# Altium PCB BRCM-V2.1-Master.PcbDoc
Units mm, origin at the board's own origin, x right, y up, seen from the top; angles counter-clockwise.
Board outline 110 x 50 mm, 2 copper layers (Top Layer, Bottom Layer); 95 components, 69 nets, 366 pads, 153 vias.
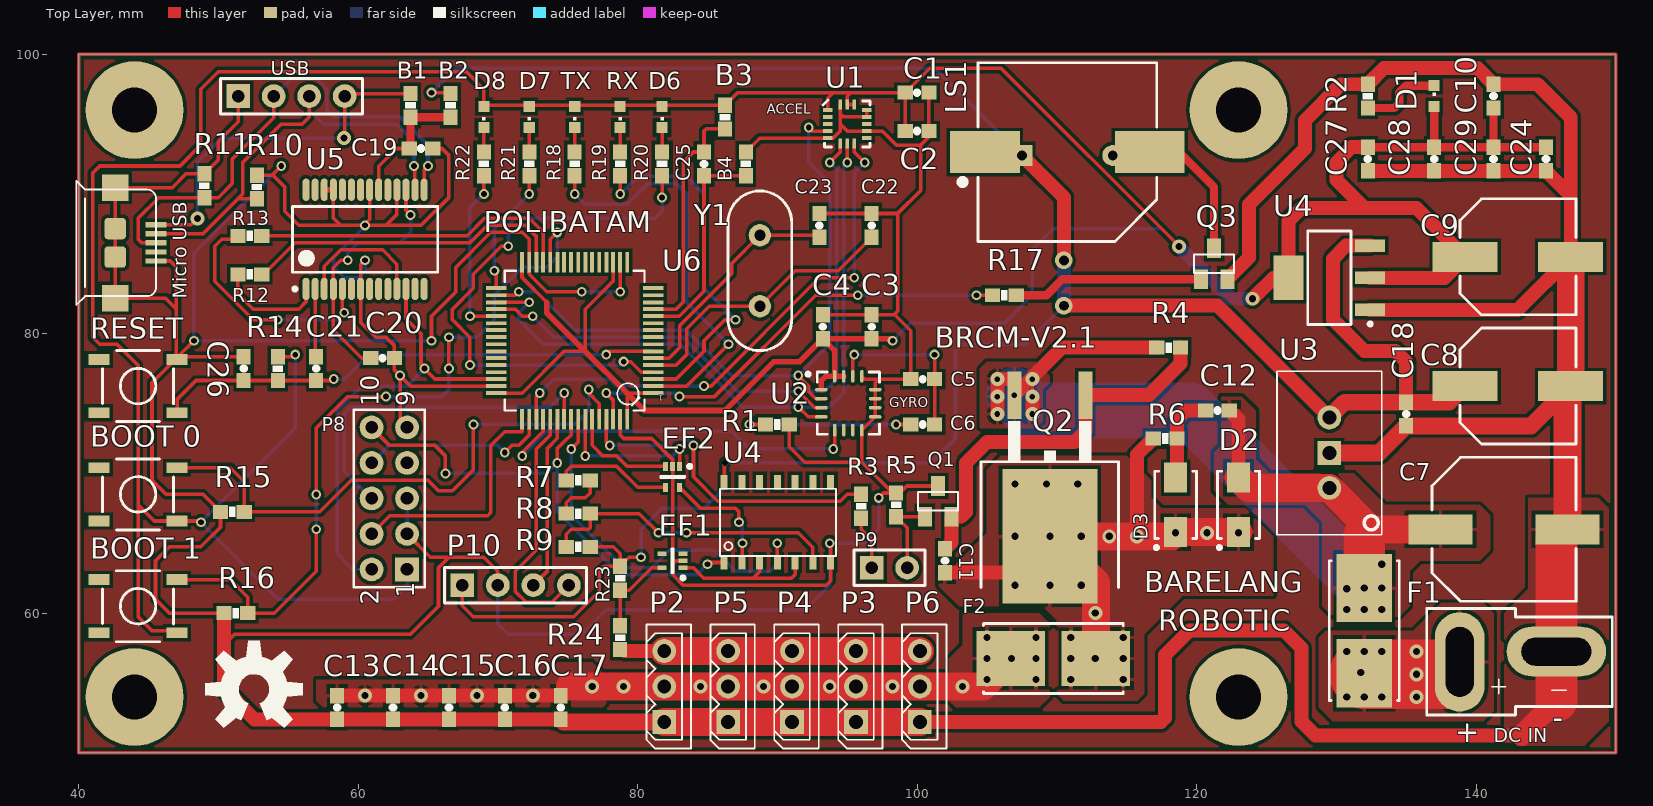
[diagram p0: Top Layer view]
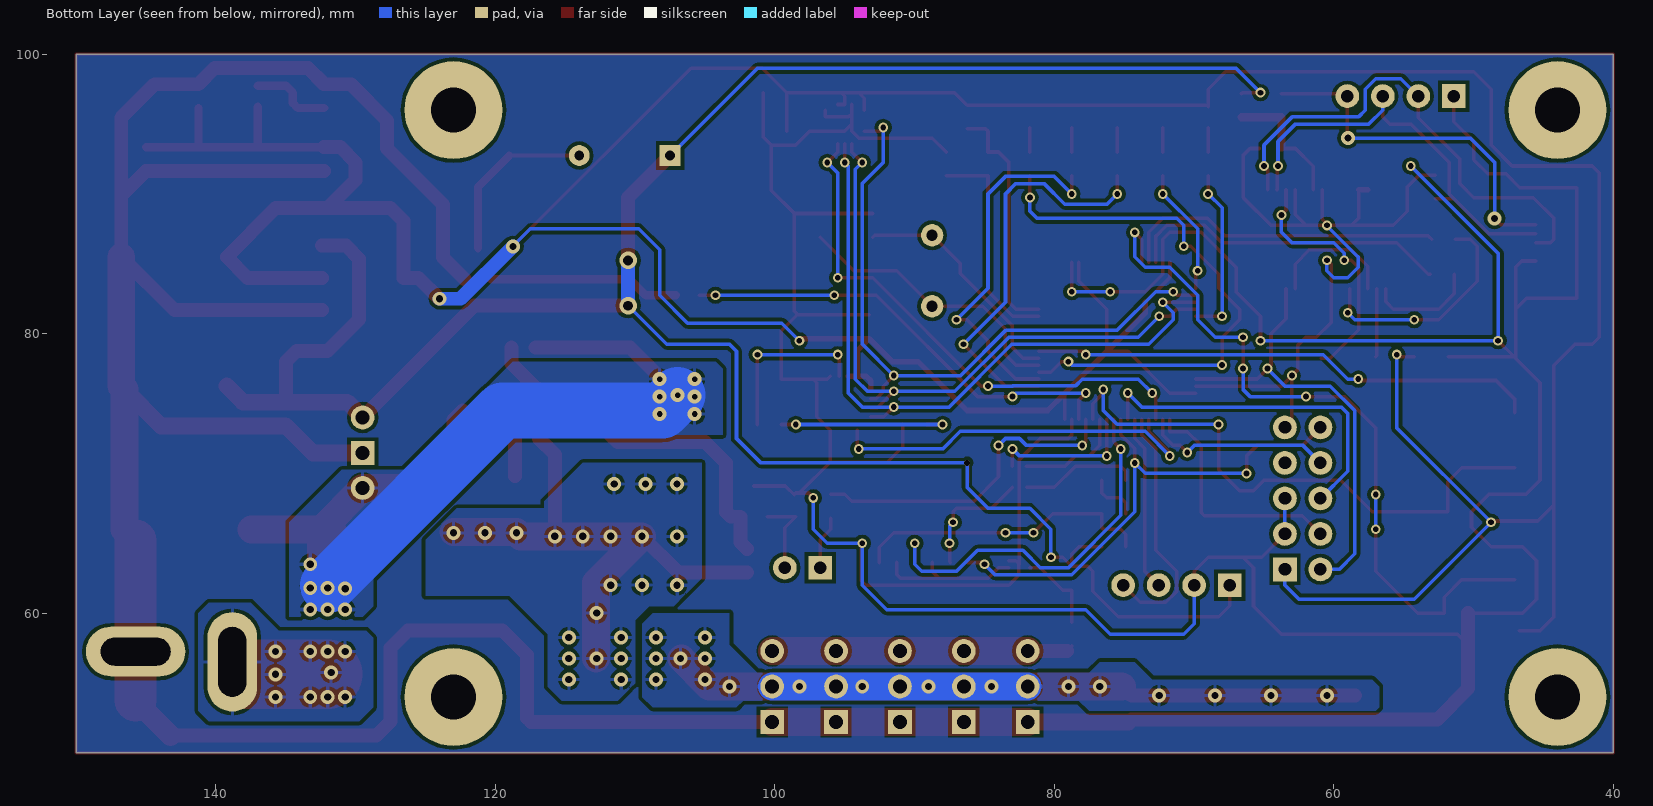
[diagram p1: Bottom Layer view, seen from below]

## Layer stack, top to bottom
Top Solder: solder mask 0.0102, Solder Resist, Dk 3.5
Top Layer: signal copper 0.0356
Dielectric 1: dielectric 0.32, FR-4, Dk 4.8
Bottom Layer: signal copper 0.0356
Bottom Solder: solder mask 0.0102, Solder Resist, Dk 3.5

## Board outline
40,50 40,100 150,100 150,50

## Design rules (kind name [scope] priority, off if disabled: settings)
Clearance [All] p1: gap=0.254 ignorepadtopadclearanceinfootprint=FALSE except(0: Arc-Hole Track-Hole SMDPad-Hole THPad-Hole Via-Hole Fill-Hole Poly-Hole Region-Hole Text-Hole)
PolygonConnect [All] p1: connectstyle=Relief reliefconductorwidth=0.254 reliefentries=4 polygonreliefangle="90 Angle" airgapwidth=0.254
RoutingVias [All] p1: holewidth=0.711 width=1.27 viastyle="Through Hole" minholewidth=0.711 minwidth=1.27 maxholewidth=0.711 maxwidth=1.27
SolderMaskExpansion [All] p1: expansion=0.102
Width [All] p1: maxlimit=0.254 minlimit=0.254 preferedwidth=0.254
30 further rules are at their usual default settings.

## Classes and differential pairs
component class Communication: B1 B2 C18 C19 C20 C21 EF1 "Micro USB" R7 R9 R10 R11 R12 R13 R23 R24 U4 U5 USB
component class "Dynamixel Power": C11 C12 C13 C14 C15 C16 C17 D2 D3 F2 P2 P3 P4 P5 P6 P9 Q1 Q2 R3 R4 R5 R6
component class "IMU Sensor": C1 C2 C3 C4 C5 C6 GYRO R1 U1
component class "Main System": B3 B4 "BOOT 0" "BOOT 1" C22 C23 C24 C25 C26 C27 C28 C29 D6 D7 D8 EF2 LS1 P8 P10 Q3 R14 R15 R16 R17 R18 R19 R20 R21 R22 RESET RX TX U6 Y1
component class "Power Conversion": C7 C8 C9 C10 D1 "DC IN" F1 R2 U3 U4

## Components (designator, comment, footprint, x,y, rotation, side; value= is the part's Value field where it differs from the comment)
B1 "BEAD" 0603-RES 63.75,96.334 r270 top value=100
B2 "BEAD" 0603-RES 66.61,96.334 r270 top value=100
B3 "BEAD" 0603-RES 86.25,95.5 r90 top value=100
B4 "BEAD" 0603-RES 87.75,92.15 r90 top value=100
"BOOT 0" "SW-PB" TACTILE-SWITCH-SMD 44.25,68.5 r180 top (schematic designator S2)
"BOOT 1" "SW-PB" TACTILE-SWITCH-SMD 44.25,60.5 r180 top (schematic designator S3)
C1 "Cap" 0603-CAP 100,97.25 r0 top value=100nF
C2 "Cap" 0603-CAP 100,94.5 r0 top value=100nF
C3 "Cap" 0603-CAP 96.75,80.5 r90 top value=100nF
C4 "Cap" 0603-CAP 93.25,80.5 r90 top value=10nF
C5 "Cap" 0603-CAP 100.4,76.75 r0 top value=10nF
C6 "Cap" 0603-CAP 100.4,73.5 r180 top value=470nF
C7 "330uF 35V" "CAP 330uF 35V SMD" 142,66 r0 top
C8 "220uF 16V" "CAP 220uF 16V" 143,76.25 r0 top
C9 "220uF 16V" "CAP 220uF 16V" 143,85.5 r0 top
C10 "Cap" 0603-CAP 141.25,97 r90 top value=100nF
C11 "Cap" 0603-CAP 102,63.75 r90 top value=10nF
C12 "Cap" 0603-CAP 121.5,74.5 r0 top value=1000nF
C13 "Cap" 0603-CAP 58.5,53.25 r90 top value=100nF
C14 "Cap" 0603-CAP 62.5,53.25 r90 top value=100nF
C15 "Cap" 0603-CAP 66.5,53.25 r90 top value=100nF
C16 "Cap" 0603-CAP 70.5,53.25 r90 top value=100nF
C17 "Cap" 0603-CAP 74.5,53.25 r90 top value=100nF
C18 "Cap" 0603-CAP 135,74.25 r90 top value=100nF
C19 "Cap" 0603-CAP 64.5,93.25 r180 top value=100nF
C20 "Cap" 0603-CAP 61.75,78.25 r180 top value=100nF
C21 "Cap" 0603-CAP 57,77.5 r270 top value=100nF
C22 "Cap" 0603-CAP 96.75,87.75 r90 top value=22pF
C23 "Cap" 0603-CAP 93,87.75 r90 top value=22pF
C24 "Cap" 0603-CAP 145,92.5 r90 top value=100nF
C25 "Cap" 0603-CAP 84.75,92.15 r90 top value=100nF
C26 "Cap" 0603-CAP 51.814,77.5 r270 top value=100nF
C27 "Cap" 0603-CAP 132.25,92.5 r90 top value=100nF
C28 "Cap" 0603-CAP 137,92.5 r90 top value=100nF
C29 "Cap" 0603-CAP 141.25,92.5 r90 top value=100nF
D1 "LED" CHIPLED_0603 137,97 r0 top
D2 "DIODA" "DIODE SS14 SODFL" 123,67.75 r90 top
D3 "DIODA" "DIODE SS14 SODFL" 118.5,67.75 r90 top
D6 "LED" CHIPLED_0603 81.75,95.5 r180 top
D7 "LED" CHIPLED_0603 72.25,95.5 r180 top
D8 "LED" CHIPLED_0603 69,95.5 r180 top
"DC IN" "DEANS JACK" "Deans Jack" 141.369,57.383 r90 top (schematic designator P1)
EF1 "EMI FILTER DUAL CHANNEL" "Emi Filter Dual Channel SOTFL" 82.5,63.75 r180 top
EF2 "EMI FILTER DUAL CHANNEL" "Emi Filter Dual Channel SOTFL" 82.5,69.75 r270 top
F1 "LitleFuse" LitleFuse 132,58.75 r90 top
F2 "LitleFuse" LitleFuse 109.75,56.75 r180 top
LS1 "Buzzer" ABSM-1574 104.85,92.99 r0 top
"Micro USB" "MICRO USB" USB_MICRO 43,86.5 r270 top (schematic designator J1)
P2 "DXL" DXL 81.907,52.213 r90 top
P3 "DXL" DXL 95.623,52.213 r90 top
P4 "DXL" DXL 91.051,52.213 r90 top
P5 "DXL" DXL 86.479,52.213 r90 top
P6 "DXL" DXL 100.195,52.213 r90 top
P8 "Header 5X2" HDR2X5 63.5,63.13 r90 top
P9 "Header 2" HDR1X2 96.75,63.25 r0 top
P10 "CEK_DATA" HDR1X4 67.46,62 r0 top
Q1 "NMOS" SOT23 101.5,68 r0 top
Q2 "PMOS" TO263 109.5,69 r180 top
Q3 "NPN" SOT23 121.25,85 r0 top
R1 "Res" 0603-RES 90,73.5 r0 top value=10K
R2 "Res" 0603-RES 132.25,97 r270 top value=1K
R3 "Res" 0603-RES 96,67.65 r270 top value=10K
R4 "Res" 0603-RES 118,79 r180 top value=47K
R5 "Res" 0603-RES 98.5,67.75 r270 top value=47K
R6 "Res" 0603-RES 117.75,72.5 r0 top value=22K
R7 "Res" 0603-RES 75.75,69.5 r0 top value=1K
R8 "Res" 0603-RES 75.75,67.125 r0 top value=0
R9 "Res" 0603-RES 75.75,64.75 r0 top value=10K
R10 "Varistor" 0603-RES 52.75,90.5 r270 top value=0
R11 "Varistor" 0603-RES 49,90.584 r270 top value=0
R12 "Res" 0603-RES 52.25,84.25 r0 top value=0
R13 "Res" 0603-RES 52.25,87 r0 top value=0
R14 "Res" 0603-RES 54.25,77.5 r270 top value=10K
R15 "Res" 0603-RES 51,67.25 r0 top value=10K
R16 "Res" 0603-RES 51.25,60 r0 top value=10K
R17 "Res" 0603-RES 106.25,82.75 r180 top value=10K
R18 "Res" 0603-RES 75.5,92.15 r90 top value=220
R19 "Res" 0603-RES 78.75,92.15 r90 top value=220
R20 "Res" 0603-RES 81.75,92.15 r90 top value=220
R21 "Res" 0603-RES 72.25,92.15 r90 top value=220
R22 "Res" 0603-RES 69,92.15 r90 top value=220
R23 "Res" 0603-RES 78.75,62.5 r90 top value=10K
R24 "Res" 0603-RES 78.75,58.25 r270 top value=0
RESET "SW-PB" TACTILE-SWITCH-SMD 44.25,76.25 r180 top (schematic designator S1)
RX "LED" CHIPLED_0603 78.75,95.5 r180 top (schematic designator D5)
TX "LED" CHIPLED_0603 75.5,95.5 r180 top (schematic designator D4)
U1 "3-axis 6/12/24g SPI/I2C accelerometer" LGA16-3MM 95,95 r0 top
U2 "L3G4200D" L3G4200D 95.075,75.025 r0 top
U3 "DC/DC Converter" "DC/DC Converter" 129.5,71.46 r90 top
U4 "Regulator 3V3" "Regulator 3V3 SOT230" 129.5,84 r180 top
U4 "74HC126D" 14-SOIC 90,66.5 r90 top
U5 "FT232RL" "USB TO SERIAL FT232RL SOP" 60.5,86.75 r90 top
U6 "ARM-based 32-bit MCU" QFP-64N 75.5,79.5 r180 top
USB "Header 4" HDR1X4 51.42,97 r0 top (schematic designator P7)
Y1 "XTAL" HC49US 88.75,84.5 r90 top

## Footprints (in the part's own frame and the unit in brackets; to place one, negate y for a bottom-side part, rotate by r counter-clockwise, add the part's x,y. Pads: shape width x height; smd on the part's side, far side on the other; paste and mask are expansions set on the pad)
14-SOIC [mil]
  rect 40x20 smd: 1(-113.19,150) 2(-113.19,100) 3(-113.19,50) 4(-113.19,0) 5(-113.19,-50) 6(-113.19,-100) 7(-113.19,-150) 8(113.19,-150) 9(113.19,-100) 10(113.19,-50) 11(113.19,0) 12(113.19,50) 13(113.19,100) 14(113.19,150)
  silkscreen extent -94,-165 94,161
0603-CAP [mm]
  rect 1.1x1 smd: 1(-0.85,0) 2(0.85,0)
  silkscreen extent 0,-0.03 0,0.03
0603-RES [mm]
  rect 1.1x1 smd: 1(-0.85,0) 2(0.85,0)
  silkscreen extent -0.23,-0.38 0.23,0.38
ABSM-1574 [mm] "Magnetic Transducer Buzzer"
  rect 5x3 smd: 1(0,0) 2(11.8,0)
  rect 1.5x1.5 hole 0.7: 1A(2.65,-0.24)
  round 1.5 hole 0.7: 2A(9.15,-0.24)
  silkscreen extent -1.83,-6.4 12.3,6.4
"CAP 220uF 16V" [mm] "Aluminum Electrolytic Capacitor, Body 8,20x8,20x10,20mm, IPC Low Density"
  rect 4.65x2.15 smd: 1(-3.775,0) 2(3.775,0)
  silkscreen extent -4.15,-4.15 4.15,4.15, body extent -4.15,-4.15 4.15,4.15, height 10.2
"CAP 330uF 35V SMD" [mm] "Aluminum Electrolytic Capacitor, Body 10,20x10,20x10,20mm, IPC Low Density"
  rect 4.6x2.15 smd: 1(-4.55,0) 2(4.55,0)
  silkscreen extent -5.15,-5.15 5.15,5.15, body extent -5.15,-5.15 5.15,5.15, height 10.2
CHIPLED_0603 [mil]
  rect 31.5x31.5 smd: 1(0,-29.53) 2(0,29.53)
  silkscreen extent -5,0 5,10
"DC/DC Converter" [mm]
  round 1.7 hole 1: 1(-2.5,0) 3(2.54,0)
  rect 1.7x1.7 hole 1: 2(0,0)
  silkscreen extent -5.85,-3.75 5.85,3.75
"Deans Jack" [mil]
  oval 280x140 hole 78.74 slot 196.85 at 0 deg: 1(-34.25,100)
  oval 140x280 hole 78.74 slot 196.85 at 90 deg: 2(-5.25,-172.5)
  silkscreen extent -184,-330 116,193
"DIODE SS14 SODFL" [mm] "SODFL, 2-Leads, Body 2,73x5,20mm, IPC Medium Density"
  rect 2.15x1.65 smd: 1(-1.95,0) 2(1.95,0)
  silkscreen extent -3.17,-1.5 2.4,1.5, body extent -2.38,-1.48 2.37,1.48, height 2.7
DXL [mm]
  rect 1.7x1.7 hole 1: 1(0,0)
  round 1.7 hole 1: 2(2.54,0) 3(5.08,0)
  silkscreen extent -1.91,-1.91 6.98,1.27
"Emi Filter Dual Channel SOTFL" [mm] "SOTFL, 5-Leads, Body 1,60x1,60mm, Pitch 0,50mm, IPC Medium Density"
  rect 0.65x0.35 smd: 1(-0.75,0.5) 2(-0.75,0) 3(-0.75,-0.5) 4(0.75,-0.5) 5(0.75,0.5)
  silkscreen extent -0.88,-0.85 0.05,1.35, body extent -0.65,-0.85 0.65,0.85, height 0.6
HC49US [mm]
  round 1.6 hole 0.8: 1(-2.54,0) 2(2.54,0)
  silkscreen extent -5.71,-2.29 5.71,2.29, body extent -5.55,-2.32 5.62,2.35, height 3.63
HDR1X2 [mm] "Connector; Header; 2 Position"
  rect 1.7x1.7 hole 0.9: 1(0,0)
  round 1.7 hole 0.9: 2(2.54,0)
  silkscreen extent -1.27,-1.27 3.81,1.27
HDR1X4 [mm] "Connector; Header; 4 Position"
  rect 1.7x1.7 hole 0.9: 1(0,0)
  round 1.7 hole 0.9: 2(2.54,0) 3(5.08,0) 4(7.62,0)
  silkscreen extent -1.27,-1.27 8.89,1.27
HDR2X5 [mm] "Connector; Header; 5x2 Position"
  rect 1.7x1.7 hole 0.9: 1(0,0)
  round 1.7 hole 0.9: 2(0,2.54) 3(2.54,0) 4(2.54,2.54) 5(5.08,0) 6(5.08,2.54) 7(7.62,0) 8(7.62,2.54) 9(10.16,0) 10(10.16,2.54)
  silkscreen extent -1.27,-1.27 11.43,3.81
L3G4200D [mm] "QFN, 16-Leads, Body 4,00x4,00mm, Pitch 0,65mm, Thermal Pad 2,03x2,03mm, IPC Medium Density"
  oval 0.9x0.25 smd: 1(-1.925,0.975) 2(-1.925,0.325) 3(-1.925,-0.325) 4(-1.925,-0.975) 9(1.925,-0.975) 10(1.925,-0.325) 11(1.925,0.325) 12(1.925,0.975)
  oval 0.25x0.9 smd: 5(-0.975,-1.925) 6(-0.325,-1.925) 7(0.325,-1.925) 8(0.975,-1.925) 13(0.975,1.925) 14(0.325,1.925) 15(-0.325,1.925) 16(-0.975,1.925)
  silkscreen extent -3,-2.22 2.22,2.22, body extent -2.07,-2.07 2.07,2.07, height 1.1
LGA16-3MM [mm]
  rect 0.7x0.28 smd: 1(-1.4,1) 2(-1.4,0.5) 3(-1.4,0) 4(-1.4,-0.5) 5(-1.4,-1) 9(1.4,-1) 10(1.4,-0.5) 11(1.4,0) 12(1.4,0.5) 13(1.4,1)
  rect 0.28x0.7 smd: 6(-0.5,-1.4) 7(0,-1.4) 8(0.5,-1.4) 14(0.5,1.4) 15(0,1.4) 16(-0.5,1.4)
  silkscreen extent -1.73,-1.65 1.62,1.72
LitleFuse [mm] "Molded Capacitor, 2-Leads, Body 9,75x4,65mm, IPC Medium Density"
  rect 4.9x3.95 smd: 1(-3.05,0) 2(3.05,0)
  silkscreen extent -5,-2.5 5,2.5, body extent -5,-2.5 5,2.5, height 4
QFP-64N [mil]
  rect 58x11 smd: 1(-221,148) 2(-221,128) 3(-221,108) 4(-221,89) 5(-221,69) 6(-221,49) 7(-221,30) 8(-221,10) 9(-221,-10) 10(-221,-30) 11(-221,-49) 12(-221,-69) 13(-221,-89) 14(-221,-108) 15(-221,-128) 16(-221,-148) 33(221,-148) 34(221,-128) 35(221,-108) 36(221,-89) 37(221,-69) 38(221,-49) 39(221,-30) 40(221,-10) 41(221,10) 42(221,30) 43(221,49) 44(221,69) 45(221,89) 46(221,108) 47(221,128) 48(221,148)
  rect 11x58 smd: 17(-148,-221) 18(-128,-221) 19(-108,-221) 20(-89,-221) 21(-69,-221) 22(-49,-221) 23(-30,-221) 24(-10,-221) 25(10,-221) 26(30,-221) 27(49,-221) 28(69,-221) 29(89,-221) 30(108,-221) 31(128,-221) 32(148,-221) 49(148,221) 50(128,221) 51(108,221) 52(89,221) 53(69,221) 54(49,221) 55(30,221) 56(10,221) 57(-10,221) 58(-30,221) 59(-49,221) 60(-69,221) 61(-89,221) 62(-108,221) 63(-128,221) 64(-148,221)
  silkscreen extent -197,-197 197,197
"Regulator 3V3 SOT230" [mm] "SOT223, 4-Leads, Body 6,50x7,00mm (avg), Pitch 2,30mm, IPC Medium Density"
  rect 2.15x0.9 smd: 1(-2.925,2.3) 2(-2.925,0) 3(-2.925,-2.3)
  rect 2.15x3.2 smd: 4(2.925,0)
  silkscreen extent -3.05,-3.35 1.55,3.42, body extent -1.85,-3.35 1.85,3.35, height 1.8
SOT23 [mm]
  rect 1x1.4 smd: 1(-0.95,-1.1) 2(0.95,-1.1) 3(0,1.1)
  silkscreen extent -1.42,-0.66 1.42,0.66
TACTILE-SWITCH-SMD [mil]
  rect 60x30 smd: 1(-110,75) 2(110,75) 3(-110,-75) 4(110,-75)
  silkscreen extent -100,-100 100,100
TO263 [mm]
  rect 1x3.4 smd: 1(-2.54,-6.6) 2(2.54,-6.6)
  rect 6.8x9.6 smd: 3(0,3.5)
  silkscreen extent -4.92,-4.74 4.92,7.17
"USB TO SERIAL FT232RL SOP" [mm] "SOP, 28-Leads, Body 10,25x5,40mm, Pitch 0,65mm, IPC Medium Density"
  oval 1.6x0.5 smd: 1(-3.55,4.225) 2(-3.55,3.575) 3(-3.55,2.925) 4(-3.55,2.275) 5(-3.55,1.625) 6(-3.55,0.975) 7(-3.55,0.325) 8(-3.55,-0.325) 9(-3.55,-0.975) 10(-3.55,-1.625) 11(-3.55,-2.275) 12(-3.55,-2.925) 13(-3.55,-3.575) 14(-3.55,-4.225) 15(3.55,-4.225) 16(3.55,-3.575) 17(3.55,-2.925) 18(3.55,-2.275) 19(3.55,-1.625) 20(3.55,-0.975) 21(3.55,-0.325) 22(3.55,0.325) 23(3.55,0.975) 24(3.55,1.625) 25(3.55,2.275) 26(3.55,2.925) 27(3.55,3.575) 28(3.55,4.225)
  silkscreen extent -3.67,-5.2 2.35,5.2, body extent -2.75,-5.2 2.75,5.2, height 2
USB_MICRO [mil]
  rect 14.96x59.84 smd: 1(-51.18,100) 2(-25.59,100) 3(0,100) 4(25.59,100) 5(51.18,100)
  rect 74.8x74.8 smd: 6(-155.51,-15) 7(155.51,-15)
  rrect30% 60x60 smd: 8(-40,-15) 9(40,-15)
  silkscreen extent -175,-125 175,100

## Part data
B1 B2 B3 B4 R10 R11: library part Res, "Resistor", LatestRevisionDate=17-Jul-2002, LatestRevisionNote="Re-released for DXP Platform.", PackageDescription="Axial Device, Thru-Hole; 2 Leads; 0.3 in Pin Spacing", PackageReference=AXIAL-0.3, Published=8-Jun-2000, Publisher="Altium Limited"
"BOOT 0" "BOOT 1" RESET: "Switch", LatestRevisionDate=17-Jul-2002, LatestRevisionNote="Re-released for DXP Platform.", PackageDescription="Switch; 2 Leads", PackageReference=SPST-2, Published=24-Mar-1999, Publisher="Altium Limited"
C1 C2 C3 C4 C5 C6 C10 C11 C12 C13 C14 C15 C16 C17 C18 C19 C20 C21 C22 C23 C24 C25 C26 C27 C28 C29: "Capacitor", LatestRevisionDate=17-Jul-2002, LatestRevisionNote="Re-released for DXP Platform.", PackageDescription="Radial Cap, Thru-Hole; 2 Leads; 0.3 in Pin Spacing", PackageReference=RAD-0.3, Published=8-Jun-2000, Publisher="Altium Limited"
D1 D6 D7 D8 RX TX: "Typical INFRARED GaAs LED", LatestRevisionDate=08-Jul-2005, LatestRevisionNote="Mech Layer 1 removed.", PackageDescription="LED; 2 Leads", PackageReference=LED-0, Published=8-Jun-2000, Publisher="Altium Limited"
LS1: "Magnetic Transducer Buzzer", ComponentLink1Description="Manufacturer Link", ComponentLink1URL=http://www.megastar.com/linecard/buzzmode/index.php, DatasheetVersion=17-Dec-2003, LatestRevisionDate=17-Dec-2003, LatestRevisionNote="Schematic revised, PCB Footprint replaced.", PackageDescription="Magnetic Transducer Buzzer", PackageReference=ABSM-1574, Published=24-Mar-1999, Publisher="Altium Limited"
P8: "Header, 5-Pin, Dual row", LatestRevisionDate=17-Jul-2002, LatestRevisionNote="Re-released for DXP Platform.", Publisher="Altium Limited"
P9: "Header, 2-Pin", LatestRevisionDate=17-Jul-2002, LatestRevisionNote="Re-released for DXP Platform.", Publisher="Altium Limited"
P10: library part "Header 4", "Header, 4-Pin", LatestRevisionDate=17-Jul-2002, LatestRevisionNote="Re-released for DXP Platform.", Publisher="Altium Limited"
Q1: "N-Channel Power MOSFET", ComponentLink1Description="Manufacturer Link", ComponentLink1URL=http://www.irf.com/, DatasheetVersion=PD-9.814, LatestRevisionDate=17-Jul-2002, LatestRevisionNote="Re-released for DXP Platform.", Note="Pin 2 is electrically connected to pin 4.", PackageDescription="TO, Thru-Hole, Vertical, Heatsink Mounted; 3 In-Line Leads; Pitch 2.54 mm", PackageReference=TO-220AB, PackageVersion=Feb-1997, Published=8-Jun-2000, Publisher="Altium Limited"
Q2: "P-Channel Power MOSFET", ComponentLink1Description="Manufacturer Link", ComponentLink1URL=http://www.irf.com/, DatasheetVersion=PD-9.390D, LatestRevisionDate=17-Jul-2002, LatestRevisionNote="Re-released for DXP Platform.", Note="Pin 4 not drawn and electrically connected to Pin 2.", PackageDescription="TO, Thru-Hole, Vertical, Heatsink Mounted; 3 In-Line Leads; Pitch 2.54 mm", PackageReference=TO-220AB, PackageVersion=Feb-1997, Published=8-Jun-2000, Publisher="Altium Limited"
Q3: "NPN Bipolar Transistor", Code_JEDEC=TO-226-AA, LatestRevisionDate=17-Jul-2002, LatestRevisionNote="Re-released for DXP Platform.", PackageDescription="TO, Flat Index; 3 In-Line, Axial Leads; Body Dia. 4.8mm; Leads 0.55 x 0.51 mm (max)", PackageReference=TO-226-AA, Published=8-Jun-2000, Publisher="Altium Limited"
R1 R2 R3 R4 R5 R6 R7 R8 R9 R12 R13 R14 R15 R16 R17 R18 R19 R20 R21 R22 R23 R24: "Resistor", LatestRevisionDate=17-Jul-2002, LatestRevisionNote="Re-released for DXP Platform.", PackageDescription="Axial Device, Thru-Hole; 2 Leads; 0.3 in Pin Spacing", PackageReference=AXIAL-0.3, Published=8-Jun-2000, Publisher="Altium Limited"
U1: library part LIS331
U4: "Quadruple Bus Buffer Gate with 3-State Outputs", Code_IPC=SOIC127P600-14, ComponentLink1Description="Manufacturer Link", ComponentLink1URL=http://www.ti.com/, ComponentLink2Description=Datasheet, ComponentLink2URL=http://www-s.ti.com/sc/ds/sn74ahct126.pdf, DatasheetVersion=Oct-1998, LatestRevisionDate=13-Apr-2006, LatestRevisionNote="IPC-7351 Footprint Added.", PackageDescription="14-Pin Small Outline Integrated Circuit 1.27 mm Pitch", PackageReference=D014, PackageVersion=Jan-1998, Published=8-Jun-2000, Publisher="Altium Limited"
U6: library part STM32F103RET6, PACKAGE=QFP-64, MPN=STM32F103RET6, OC_FARNELL=1624138, OC_NEWARK=01P4101, SUPPLIER=STMICROELECTRONICS
USB: "Header, 4-Pin", LatestRevisionDate=17-Jul-2002, LatestRevisionNote="Re-released for DXP Platform.", Publisher="Altium Limited"
Y1: "Crystal Oscillator", LatestRevisionDate=17-Jul-2002, LatestRevisionNote="Re-released for DXP Platform.", PackageDescription="Crystal, Thru-Hole; 2 Leads; Body 3.1 x 8.2 mm (Dia.xH)", PackageReference=R38, Published=8-Jun-2000, Publisher="Altium Limited"

## Free pads (board coordinates)
  round 7 hole 3.2: 3(44,96) 3(123,96) 4(44,54) 4(123,54)

## Via types
v1: diameter 0.7, hole 0.411, Top Layer to Bottom Layer, 82 vias
v2: diameter 1/1 (per signal layer), hole 0.511, Top Layer to Bottom Layer, 61 vias
v3: diameter 1/1 (per signal layer), hole 0.4, Top Layer to Bottom Layer, 7 vias
v4: diameter 1.27, hole 0.711, Top Layer to Bottom Layer, 2 vias
v5: diameter 0.411, hole 0.411, Top Layer to Bottom Layer, 1 vias

## Nets (pads, with @x,y where several pads share a name; then routed paths per layer and width w, separated by ;. In a path a pad name is that pad's centre, name@x,y a point inside that pad or via, vN(x,y) a via of type N, cw(c..) or ccw(c..) an arc to the next point about the centre after c; other vN are vias at no path point)
3V3: "BOOT 0.1" "BOOT 1.1" B3.2 C1.1 C2.1 C3.1 C4.1 C9.1 C10.1 C24.2 C27.2 C28.2 C29.2 D1.1 D6.1 D7.1 D8.1 P8.1 R14.1 RX.1 TX.1 U1.1 U1.14 U1.15 U2.1 U2.15 U2.16 U4.2@132.425,84 U4.4@126.575,84 U6.1 U6.19 U6.32 U6.48 U6.64 | length 318.9
  Top Layer w0.254: 46.75,58.75 45.25,58.75 44.25,59.75 44.25,67.75 ; v1(48.75,66.5) 48.655,66.595 47.044,66.595 45.405,66.595 44.25,67.75 ; R14.1 55.35,78.35 v1(55.5,78.5) ; U6.48 71.741,75.741 74.737,78.737 76.25,78.737 76.25,81.75 78.243,83.743 U6.19 ; U6.32@71.728,85.113 71.728,84.022 73.5,82.25 ; 79.244,75.744 79.247,75.741 U6.1 ; U6.64 79.259,75.728 ; U1.1 93.6,96.85 94,97.25 ; U1.14 U1.15 95,97 95.25,97.25 ; v1@98.1,79.65 v1(98.25,79.5) ; C2.1 C1.1 ; v2(118.75,86.25) 106,99 100.9,99 C1.1 ; 44.25,67.75 44.25,77.75 42.75,79.25 41.5,79.25 41,79.75 41,91.5 41.5,92 47.25,92 48.75,93.5 48.75,97.5 50,98.75 67.75,98.75 69,97.5 D8.1 69.1,96.35 B3.2 87.15,97.25 94,97.25 ; 94,97.25 95.25,97.25 ; 95.25,97.25 C1.1
  Top Layer w0.4: 73.5,82.25 73.5,81.487 76.25,78.737 79.244,75.744 ; 79.259,75.728 80.487,74.5 86.25,74.5 89.75,78 91.6,78 C4.1 ; U2.1 93.15,76.65 93.45,76.95 U2.16 ; U2.15 U2.16 ; v1@98.1,79.65 C3.1 C4.1 ; C4.1 94.1,78.8 U2.16
  Top Layer w0.6: C27.2 C28.2 ; D1.1 C28.2 ; C10.1 C29.2 ; C24.2 C29.2 ; C28.2 C29.2
  Top Layer w1: v2(124,82.5) 125.5,84 126.575,84 126.575,88.075 127.5,89 132,89 ; C27.2 131.1,93.35 130,92.25 130,91 132,89 ; U4.2@132.425,84 137.725,84 C9.1 135.725,89 132,89
  Bottom Layer w0.254: v1(55.5,78.5) 55.5,73.25 v1(48.75,66.5) 54.25,61 62.5,61 63.5,62 P8.1 ; v1(98.25,79.5) 99.5,80.75 106.25,80.75 108.25,82.75 108.25,86 109.75,87.5 117.5,87.5 v2(118.75,86.25)
  Bottom Layer w1: v2(118.75,86.25) 122.5,82.5 v2(124,82.5)
58: EF2.1 U6.58 | length 10.8
  Top Layer w0.254: v1(76.25,71.25) 76.262,71.262 U6.58 ; EF2.1 v1(83,71.75)
  Bottom Layer w0.254: v1(76.25,71.25) 82.5,71.25 v1(83,71.75)
59: EF2.3 U6.59 | length 7.8
  Top Layer w0.254: U6.59 76.745,72.005 77.5,71.25 78.5,71.25 79.25,70.5 EF2.3
ACC_CS: U1.8 U6.51 | length 38.5
  Top Layer w0.254: U6.51 72.757,75.507 v1(73,75.75) ; v1(84.75,76.25) 85.25,76.25 92.992,83.992 95.492,83.992 v1(95.5,84) ; U1.8 95.5,93 v1(96.25,92.25)
  Bottom Layer w0.254: v1(73,75.75) 74,76.75 78,76.75 78.492,76.258 82.96,76.258 82.968,76.25 v1(84.75,76.25) ; v1(95.5,84) 95.5,91.5 v1(96.25,92.25)
BOOT: "BOOT 0.3" R15.2 U6.60 | length 41.5
  Top Layer w0.254: 47.044,70.405 50.845,70.405 51.85,69.4 R15.2 57.25,67.25 59.5,69.5 65,69.5 65.75,68.75 66.75,68.75 68.25,70.25 v1(68.25,73.5) ; v1(76.5,76) 76.5,75.75 77.253,74.997 U6.60
  Bottom Layer w0.254: v1(68.25,73.5) 68.266,73.516 75.516,73.516 76.5,74.5 v1(76.5,76)
BOOT1: "BOOT 1.3" R16.2 U6.28 | length 52.8
  Top Layer w0.254: 47.044,62.405 50.845,62.405 52.1,61.15 R16.2 54,60 57,63 v1(57,66) ; v1(57,68.5) 57,73.25 59.25,75.5 v1(62,75.5) ; v1(66.5,77.5) v1(66.5,79.75) ; U6.28 73.747,86.747 v1(74.25,87.25)
  Bottom Layer w0.254: v1(57,66) v1(57,68.5) ; v1(62,75.5) 66,75.5 66.5,76 v1(66.5,77.5) ; v1(66.5,79.75) 68.5,79.75 69.75,81 69.75,82.75 71.75,84.75 73.5,84.75 74.25,85.5 v1(74.25,87.25)
BUZZER: R17.2 U6.62 | length 32.8
  Top Layer w0.254: v1(77.75,75.75) 78.243,75.257 U6.62 ; v1(83,75.5) 85.5,75.5 92.75,82.75 v1(95.75,82.75) ; v1(104.25,82.75) R17.2
  Bottom Layer w0.254: v1(77.75,75.75) 82.75,75.75 v1(83,75.5) ; v1(95.75,82.75) v1(104.25,82.75)
CPU_RXD: U6.43
DXL_RXD: EF2.4 R7.1 | length 8.5
  Top Layer w0.254: R7.1 74.9,70.15 75.25,70.5 78.5,70.5 80,69 EF2.4@81.992,69
DXL_TXD: EF2.5 U4.2@87.46,63.625 | length 8.7
  Top Layer w0.254: EF2.5@83.008,69 83.008,68.992 84.5,67.5 87,67.5 87.25,67.25 v1(87.25,66.5) ; U4.2@87.46,63.625 87.5,63.665 v1(87.5,65)
  Bottom Layer w0.254: v1(87.25,66.5) 87.5,66.25 v1(87.5,65)
ENA_DXL_PWR: R3.1 U6.61 | length 23.6
  Top Layer w0.254: U6.61 77.761,72.239 v1(78,72) ; v1(84,72) 84,69.75 85.742,68.008 87.21,68.008 87.218,68 94.5,68 95,68.5 R3.1
  Bottom Layer w0.254: v1(78,72) 82,72 82.5,72.5 83.5,72.5 v1(84,72)
ENA_RX: U4.4@90,63.625 U6.57 | length 27.6
  Top Layer w0.254: v1(75.25,71.75) 75.754,72.254 U6.57 ; U4.4@90,63.625 v1(90,65)
  Bottom Layer w0.254: v1(75.25,71.75) 75.25,67 78.992,63.258 81.008,63.258 82.25,64.5 85.5,64.5 87,63 89.5,63 90,63.5 v1(90,65)
ENA_TX: P8.10 U4.1@86.19,63.625 U6.56 | length 36.9
  Top Layer w0.254: P8.10 62.25,72 65.5,72 66.25,71.25 v1(66.25,70) ; v1(74.25,70.75) 74.25,71.784 74.947,72.481 74.973,72.481 75.246,72.754 U6.56 ; v1(85,63.5) 85.125,63.625 U4.1@86.19,63.625
  Bottom Layer w0.254: v1(66.25,70) 73.5,70 v1(74.25,70.75) 74.25,67.25 78.75,62.75 84.25,62.75 v1(85,63.5)
GND: "DC IN.2" "Micro USB.5" "Micro USB.6" "Micro USB.7" "Micro USB.8" "Micro USB.9" B4.2 C1.2 C2.2 C3.2 C4.2 C5.1 C7.2 C8.2 C9.2 C10.2 C13.1 C14.1 C15.1 C16.1 C17.1 C18.1 C19.1 C20.1 C22.2 C23.2 C24.1 C26.1 C27.1 C28.1 C29.1 EF1.2 EF2.2 P2.1 P3.1 P4.1 P5.1 P6.1 P8.3 P8.5 P8.9 P10.2 Q1.3 Q3.2 R1.2 R2.1 R5.1 R10.1 R11.1 R15.1 R16.1 RESET.3 U1.5 U1.10 U1.12 U1.13 U1.16 U2.8 U2.9 U2.10 U2.11 U2.12 U2.13 U3.2 U4.1@132.425,81.7 U4.7 U5.7 U5.18 U5.21 U5.25 U5.26 U6.18 U6.31 U6.47 U6.63 USB.1 | length 603
  Top Layer w0.254: 45.54,85.2 46.55,85.2 47,84.75 47,81.75 ; v1(48.25,79.5) RESET.3@47.1,78.35 ; 50.4,57.75 51.15,58.5 63.75,58.5 65.75,60.5 65.75,63.25 66.5,64 ; R16.1 46.5,60 45.5,61 45.5,63.75 46.5,64.75 48.75,64.75 50.15,66.15 R15.1 48.9,68.5 46.25,68.5 45.25,69.5 45.25,76.5 RESET.3@47,78.25 ; USB.1 51.42,95.17 50,93.75 50,92.434 R11.1 47.684,91.434 46.7,90.45 42.619,90.45 42.619,87.516 42.619,85.484 42.619,82.55 46.2,82.55 47,81.75 ; C26.1 RESET.3@47.1,78.35 ; R10.1 53.85,91.35 ; v1(54.5,92) 53.85,91.35 ; U5.25 58.225,88.275 58.75,87.75 ; v1(60.5,85.25) 60.175,84.925 U5.7 60.175,80.825 61.25,79.75 62,79.75 62.6,79.15 C20.1 62.6,77.4 v1(63,77) ; U5.21 60.825,88.2 v1@60.375,87.75 ; U5.18 62.775,88.525 62,87.75 ; P8.3 65.17,64 66.5,64 ; P8.9 63,73.79 v1(63,77) ; v1(65.25,79.5) 65.25,81.25 67,83 67,84.75 69.5,87.25 71.748,87.25 72.249,86.749 U6.31 72.249,84.251 73.5,83 v1(76,83) ; C19.1 66,93.25 66.5,92.75 66.5,89.75 64.5,87.75 62,87.75 ; U6.47 63.751,76.249 v1(63,77) ; P10.2 70,63 69,64 66.5,64 ; C17.1 C17.1@74.687,52.213 ; U6.63 78.751,72.749 79,72.5 81,72.5 82.5,71 EF2.2 82.5,63.5 ; v1(78.751,83.001) U6.18 ; EF1.2 82.75,63.75 82.5,63.5 ; B4.2 88.729,93.979 U1.5@93.6,93.979 ; R1.2 90.85,71.9 91.95,70.8 96.05,70.8 ; C23.2 C22.2 98.6,88.6 ; C4.2 C3.2 98.35,81.35 ; U1.5 94,94 94.5,94.5 94.5,95 ; v1(93.75,65) 93.81,64.94 U4.7 93.81,62.31 93.5,62 83.25,62 82.544,62.706 82.544,63.456 82.5,63.5 ; U1.16 94.5,95.75 ; U2.13 96.25,76.75 97.25,76.75 ; U1.13 96.4,95.521 94.729,95.521 94.5,95.75 ; v1(97.25,68.25) 97.6,68.6 R5.1@98.25,68.6 ; R5.1 R5.1@98.25,68.6 ; R5.1@98.625,68.475 99.25,69.1 Q1.3 ; C1.2 C2.2 100.85,94.1 100.25,93.5 ; 117.463,52.213 117.75,52.5 ; C7.2@145.75,65.2 C7.2 ; C8.2@146.55,76.025 C8.2 ; RESET.3@47,78.25 47,81.75 ; RESET.3@47,78.25 RESET.3@47.1,78.35 ; 53.85,91.35 53.9,91.35 54.75,90.5 54.75,88.75 55.75,87.75 58.75,87.75 ; 58.75,87.75 v1@60.375,87.75 ; v1@60.375,87.75 v1(60.5,87.75) 62,87.75 ; 94.5,95 95,94.5 U1.10 97.5,94.5 98.5,93.5 100.25,93.5 ; 94.5,95 94.5,95.75 ; 96.05,70.8 R5.1@98.25,68.6 ; 96.05,70.8 U2.8 U2.9 U2.10 U2.11 U2.12 97,76.5 97.25,76.75 ; 97.25,76.75 C5.1 99.55,80.2 98.4,81.35 98.35,81.35 ; 98.35,81.35 98.6,81.6 98.6,88.6 ; 98.6,88.6 100.25,90.25 100.25,93.5
  Top Layer w0.4: U5.26 U5.25
  Top Layer w1: R16.1 50.4,57.75 50.4,54.6 52.6,52.4 C13.1 C14.1 C15.1 C16.1 C17.1 ; P6.1 117.463,52.213 ; 117.75,52.5 117.75,57 119.5,58.75 126.25,58.75 127.5,57.5 127.5,52.25 128.5,51.25 143.25,51.25 ; Q3.2 123.75,85.45 123.75,89.25 127.75,93.25 127.75,95.25 130.35,97.85 R2.1 133.4,99 140.1,99 C10.2 144.4,97.85 146.775,95.475 146.775,89.875 ; C27.1 C28.1 C29.1 C24.1 146.775,89.875 ; U4.1@132.425,81.7 142.975,81.7 C9.2 146.775,89.875
  Top Layer w1.2: C17.1@74.687,52.213 P2.1 ; U3.2 133.06,71.46 C18.1 143.925,73.4 C8.2@146.55,76.025
  Top Layer w1.5: 143.25,51.25 145.75,53.75
  Top Layer w2: P2.1 P5.1 P4.1 P3.1 P6.1 ; C7.2 C8.2@146.55,76.025 ; C8.2 C9.2
  Top Layer w3: 145.75,53.75 145.75,57.25 C7.2@145.75,65.2
  Bottom Layer w0.254: v1(54.5,92) 48.25,85.75 v1(48.25,79.5) v1(65.25,79.5) ; v1(60.5,85.25) 60.5,84.5 60,84 59,84 58.25,84.75 58.25,85.5 58.282,85.5 v1@60.516,87.734 ; P8.3 P8.5 ; P10.2 70,59.25 70.75,58.5 76,58.5 77.75,60.25 92,60.25 93.75,62 v1(93.75,65) 96.25,65 97.25,66 v1(97.25,68.25) ; v1(76,83) 78.75,83 v1(78.751,83.001)
GYRO_CS: U2.5 U6.52 | length 28.1
  Top Layer w0.254: v1(71.75,71.25) 71.75,71.521 73.239,73.011 U6.52 ; v1(94,71.75) 94.1,71.85 U2.5
  Bottom Layer w0.254: v1(71.75,71.25) 73.508,73.008 86.742,73.008 88,71.75 v1(94,71.75)
JTDI: P8.8 U6.50 | length 13.7
  Top Layer w0.254: v1(70.5,71.5) 71,72 71.5,72 72.249,72.749 U6.50
  Bottom Layer w0.254: P8.8 62.21,72 70,72 v1(70.5,71.5)
JTDO: P8.6 U6.55 | length 25.1
  Top Layer w0.254: U6.55 74.738,75.738 v1(74.75,75.75)
  Bottom Layer w0.254: P8.6 59.008,70.162 59.008,74.29 59.468,74.75 73.75,74.75 v1(74.75,75.75)
JUM: U5.3 U5.11 | length 9.5
  Top Layer w0.254: U5.3 57.575,84.825 58.75,86 61.75,86 62.775,84.975 U5.11
LED2: R20.1 U6.4 | length 40
  Top Layer w0.254: v1(68,77.75) 68,79.75 66.75,81 66.75,81.75 68.25,83.25 68.25,84.25 70.25,86.25 v1(70.75,86.25) ; v1(79,78) 79.5,78 80.261,77.239 U6.4 ; v1(81.75,89.75) R20.1
  Bottom Layer w0.254: v1(68,77.75) 78.75,77.75 v1(79,78) ; v1(70.75,86.25) 70.75,87.75 71.25,88.25 81.25,88.25 81.75,88.75 v1(81.75,89.75)
LED3: R21.1 U6.33 | length 9.1
  Top Layer w0.254: v1(69.75,84.5) 69.887,84.363 U6.33 ; v1(72.25,90) R21.1
  Bottom Layer w0.254: v1(69.75,84.5) 69.75,87.5 v1(72.25,90)
LED4: R22.1 U6.37 | length 12.4
  Top Layer w0.254: v1(68,81.25) 68.003,81.253 U6.37 ; v1(69,90) R22.1
  Bottom Layer w0.254: v1(68,81.25) 68,89 v1(69,90)
LED_RX: R19.1 U6.3 | length 26.4
  Top Layer w0.254: v1(78.75,90) R19.1 ; U6.3 82.757,76.757 84.75,78.75 84.75,79.5 86.25,81 v1(87,81)
  Bottom Layer w0.254: v1(78.75,90) 80,91.25 83.5,91.25 84.75,90 84.75,83.25 v1(87,81)
LED_TX: R18.1 U6.2 | length 29.1
  Top Layer w0.254: v1(75.5,90) R18.1 ; U6.2 83.499,76.249 v1(86.5,79.25)
  Bottom Layer w0.254: v1(75.5,90) 76.231,89.269 79.269,89.269 80.742,90.742 82.758,90.742 83.5,90 83.5,82.25 v1(86.5,79.25)
MISO: U1.7 U2.4 U6.35 | length 50.1
  Top Layer w0.254: U6.35 72.243,82.243 v1(72.25,82.25) ; v1(91.5,74.75) 92.2,74.05 U2.4 ; v1(95,92.25) U1.7
  Bottom Layer w0.254: v1(72.25,82.25) 71.5,81.5 71.5,81 73.258,79.242 83.04,79.242 87.532,74.75 v1(91.5,74.75) 93.75,74.75 94.75,75.75 94.75,92 v1(95,92.25)
MOSI: U1.6 U2.3 U6.36 | length 46.7
  Top Layer w0.254: U6.36 71.239,81.761 71.75,81.25 v1(72.5,81.25) ; v1(91.5,75.875) 92.675,74.7 U2.3 ; v1(93.75,92.25) 94.5,93 U1.6
  Bottom Layer w0.254: v1(72.5,81.25) 74,79.75 83.25,79.75 87.125,75.875 v1(91.5,75.875) 93.375,75.875 94.242,76.742 94.242,91.758 v1(93.75,92.25)
NetB1_1: "Micro USB.1" B1.1 USB.4 | length 26.2
  Top Layer w0.254: 45.54,87.8 48.05,87.8 v2(48.5,88.25) ; v2(59,94) 59.04,94.04 USB.4 59.224,97.184 B1.1
  Bottom Layer w0.254: v2(48.5,88.25) 48.5,92.25 50.25,94 v2(59,94)
NetC5_2: C5.2 C6.1 U2.14 | length 12.3
  Top Layer w0.254: U2.14 95.4,78.4 v1(95.5,78.5) ; C6.1 C5.2 v1(101.25,78.5)
  Bottom Layer w0.254: v1(95.5,78.5) v1(101.25,78.5)
NetC6_2: C6.2 R1.1 | length 12.7
  Top Layer w0.254: v1(88,73.5) R1.1 ; v1(98.5,73.5) C6.2
  Bottom Layer w0.254: v1(88,73.5) v1(98.5,73.5)
NetC11_1: C11.1 D2.1 D3.1 F2.1 Q2.3 R6.1 | length 40.2
  Top Layer w0.254: v2(109.5,65.5) Q2.3@109.9,65.5 ; D3.1@118.2,65.5 D3.1
  Top Layer w1: C11.1 106.9,62.9 v2(109.5,65.5) ; v2(115.75,65.5) 115.75,71.35 R6.1
  Top Layer w2: F2.1 112.8,62.2 v2(109.5,65.5) D3.1@118.2,65.5 ; D3.1 D2.1
  other v2: 111,55.25 114.75,55.25 111,56.75 112.75,56.75 114.75,56.75 111,58.25 114.75,58.25 112.75,60 107,62 109.5,62 111.75,62 107,65.5 111.75,65.5 113.75,65.5 118.5,65.75 120.75,65.75 123,65.75 107,69.25 109.25,69.25 111.5,69.25
NetC11_2: C11.2 Q1.2 Q2.1 R4.1 | length 28.1
  Top Layer w1: C11.2 102.45,65.05 Q1.2 103.15,66.9 103.5,67.25 103.5,70.75 105,72.25 111.25,72.25 112.04,73.04 Q2.1 116.6,75.6 118.85,77.85 R4.1
NetC12_1: C12.1 D3.2 R6.2 | length 6.5
  Top Layer w0.254: D3.2 D3.2@118.6,69.8
  Top Layer w1: D3.2@118.6,69.8 R6.2 118.6,73.85 119.25,74.5 C12.1
NetC20_2: C20.2 U5.4 U5.17 | length 18
  Top Layer w0.254: v1(59.25,85.25) 58.75,85.25 58.225,84.725 U5.4 58.225,80.275 60.25,78.25 C20.2 ; U5.17 63.425,88.825 v1(63.75,88.5)
  Bottom Layer w0.254: v1(59.25,85.25) 59.25,85.75 60,86.5 63,86.5 63.75,87.25 v1(63.75,88.5)
NetC21_1: C21.1 U5.2 | length 4.9
  Top Layer w0.254: U5.2 56.925,78.425 C21.1
NetC22_1: C22.1 U6.5 Y1.1 | length 20.5
  Top Layer w0.254: U6.5 82.747,77.747 83.508,78.508 83.508,80.353 85.115,81.96 Y1.1 91.29,84.5 94.35,84.5 C22.1
NetC23_1: C23.1 U6.6 Y1.2 | length 16.9
  Top Layer w0.254: U6.6 82.255,78.255 83,79 83,80.563 86.75,84.313 86.75,85.04 Y1.2 92.86,87.04 C23.1
NetD1_2: D1.2 R2.2 | length 5.9
  Top Layer w0.6: R2.2 134.15,96.15 134.5,96.5 134.5,97.25 135,97.75 D1.2
NetD4_2: R18.2 TX.2 | length 1.7
  Top Layer w0.254: R18.2 TX.2
NetD5_2: R19.2 RX.2 | length 1.7
  Top Layer w0.254: R19.2 RX.2
NetD6_2: D6.2 R20.2 | length 1.7
  Top Layer w0.254: R20.2 D6.2
NetD7_2: D7.2 R21.2 | length 1.7
  Top Layer w0.254: R21.2 D7.2
NetD8_2: D8.2 R22.2 | length 1.7
  Top Layer w0.254: R22.2 D8.2
NetEF1_1: EF1.1 U4.3@88.73,63.625 U4.5 | length 10.6
  Top Layer w0.254: EF1.1 84,63.25 84.742,62.508 88.258,62.508 ; U4.3@88.73,63.625 88.73,62.98 88.258,62.508 ; U4.5 91.27,62.77 91.008,62.508 88.258,62.508
NetEF1_5: EF1.5 R23.1 R24.1 | length 6
  Top Layer w0.254: R24.1@78.75,59.35 R23.1 79.4,61.65 81,63.25 EF1.5
NetLS1_2: LS1.2 LS1.2A Q3.3 | length 12.6
  Top Layer w0.254: LS1.2A LS1.2@119,92.75
  Top Layer w0.6: LS1.2@119,92.75 121.25,90.5 Q3.3
NetP9_1: P9.1 R3.2 | length 3.9
  Top Layer w0.254: R3.2 96,66 96.75,65.25 P9.1
NetP9_2: P9.2 Q1.1 R5.2 | length 6
  Top Layer w0.254: P9.2 99.29,66.11 R5.2 Q1.1
NetQ3_1: Q3.1 R17.1 | length 13.7
  Top Layer w0.6: R17.1 109.25,82.75 110.4,83.9 Q3.1
NetR7_2: R7.2 R8.1 | length 3.7
  Top Layer w0.254: R8.1 74.9,67.9 75.25,68.25 76.25,68.25 76.6,68.6 R7.2
NetR12_1: R12.1 U5.1 | length 7.9
  Top Layer w0.254: R12.1 51.4,82.85 52.5,81.75 55.75,81.75 56.275,82.275 U5.1
NetR13_1: R13.1 U5.5 | length 16.6
  Top Layer w0.254: R13.1@51.3,86.75 50.25,86.75 49.75,86.25 49.75,83.75 52.5,81 v1(54.25,81) ; U5.5 58.875,81.625 v1(59,81.5)
  Bottom Layer w0.254: v1(54.25,81) 58.5,81 v1(59,81.5)
PC_RXD: R12.2 U6.30 | length 23.3
  Top Layer w0.254: R12.2 53.25,84.25 55.508,86.508 68.008,86.508 69.258,87.758 71.958,87.758 72.723,86.993 72.757,86.993 U6.30 U6.30@72.75,85.12
PC_TXD: R13.2 U6.29 | length 23.4
  Top Layer w0.254: R13.2@53,86.75 53.266,87.016 67.798,87.016 69.048,88.266 72.234,88.266 73.239,87.261 U6.29
RESET: C21.2 C26.2 R14.2 RESET.1 U6.7 | length 36.4
  Top Layer w0.254: RESET.1 47.044,75.294 48.4,76.65 C26.2 R14.2 C21.2 58.15,76.65 v1(58.25,76.75) ; v1(77.75,78.5) 77.988,78.738 U6.7
  Bottom Layer w0.254: v1(58.25,76.75) 59,76.75 60.75,78.5 v1(77.75,78.5)
RXD_TTL: R8.2 R9.1 U4.6 | length 21.8
  Top Layer w0.254: R9.1 74.9,65.65 75.25,66 76.5,66 76.6,66.1 R8.2 80.125,67.125 v1(81.5,65.75) ; v1(83.5,65.75) 91.5,65.75 92.54,64.71 U4.6
  Bottom Layer w0.254: v1(81.5,65.75) v1(83.5,65.75)
SCK: U1.4 U2.2 U6.34 | length 47.5
  Top Layer w0.254: U6.34 71.251,82.751 v1(71.5,83) ; v1(91.5,77) 92.25,76.25 92.25,75.859 92.759,75.35 U2.2 ; v1(92.25,94.75) 92.5,94.5 U1.4
  Bottom Layer w0.254: v1(71.5,83) 72.75,83 75.492,80.258 83.46,80.258 86.718,77 v1(91.5,77) 93.734,79.234 93.734,90.766 92.25,92.25 v1(92.25,94.75)
SWCLK: P8.4 U6.49 | length 17.5
  Top Layer w0.254: P8.4 62.269,66.979 69.271,66.979 69.5,67.208 69.5,72 70.491,72.991 71.741,72.991 U6.49
TTL_DATA: P2.3 P3.3 P4.3 P5.3 P6.3 R24.2 | length 21.6
  Top Layer w0.254: R24.2@78.75,57.65 R24.2@79.107,57.293
  Top Layer w1: R24.2@79.107,57.293 P2.3
  Top Layer w2: P2.3 P5.3 P4.3 P3.3 P6.3
UART5_RX: P10.3 U6.54 | length 12.6
  Top Layer w0.254: P10.3 73.519,62.979 73.519,71.771 74.255,72.508 U6.54
UART5_TX: P10.4 U6.53 | length 18
  Top Layer w0.254: U6.53 73.747,72.747 72.75,71.75 72.75,64.5 71.25,63 71.25,61.549 72.03,60.769 73.849,60.769 P10.4
USB_POW: B1.2 B2.2 C19.2 U5.20 | length 9.5
  Top Layer w0.254: U5.20 61.475,91.975 62.75,93.25 C19.2 C19.2@63.75,93.35
  Top Layer w0.6: C19.2@63.75,93.35 B1.2 B2.2
USB_SLEEP: P8.2 U5.12 U6.46 | length 32.4
  Top Layer w0.254: U5.12 63.425,81.075 64.5,80 64.5,77.75 v1(64.75,77.5) 65.493,76.757 U6.46
  Bottom Layer w0.254: P8.2 59.62,63.13 58.5,64.25 58.5,74.5 60.25,76.25 63.5,76.25 v1(64.75,77.5)
USBDM: "Micro USB.2" R10.2 U5.16 USB.3 | length 31.5
  Top Layer w0.254: 45.54,87.15 48.9,87.15 51.4,89.65 ; R10.2 51.4,89.65 ; USB.3 56.5,95.5 56,95 54.5,95 51.75,92.25 51.75,90 51.4,89.65 ; v1(64,92) 64.056,91.944 64.056,90.319 U5.16
  Bottom Layer w0.254: USB.3 56.5,96 57.5,95 62.75,95 64,93.75 v1(64,92)
USBDP: "Micro USB.3" R11.2 U5.15 USB.2 | length 35.9
  Top Layer w0.254: 45.54,86.5 44.5,86.5 44.25,86.75 44.25,88.25 45.734,89.734 R11.2 49.984,89.734 51,90.75 51,92.5 53.96,95.46 USB.2 ; U5.15 64.731,90.306 64.731,91.731 v1(65,92)
  Bottom Layer w0.254: USB.2 55.21,98.25 56.25,98.25 56.269,98.231 57.01,98.231 57.75,97.491 57.75,96 58.242,95.508 62.992,95.508 65,93.5 v1(65,92)
VCC: B2.1 C8.1 C18.2 LS1.1 LS1.1A P10.1 R9.2 R23.2 U3.3 U4.3@132.425,86.3 U4.14 | length 174.1
  Top Layer w0.254: v1(65.25,97.25) 66.544,97.25 B2.1 ; P10.1 67.46,60.54 68.25,59.75 75.42,59.75 77.25,61.58 77.25,63 77.6,63.35 R23.2 ; R9.2 78.25,64.75 78.75,64.25 R23.2 ; v1(80.25,64) 79.4,64 R23.2 ; U4.14 86.19,70.69 v5(86.25,70.75)
  Top Layer w1: LS1.1A 110.5,89.75 v4(110.5,85.25) ; v4(110.5,82) 121.5,82 U3.3 ; U4.3@132.425,86.3 130.7,86.3 129.75,85.35 129.75,81 132,78.75 134.25,78.75 135,78 C18.2
  Top Layer w1.2: U3.3 130.6,75.1 C18.2 138.075,75.1 C8.1
  Bottom Layer w0.254: v1(65.25,97.25) 67,99 101.25,99 LS1.1A ; v1(80.25,64) 80.25,66 81.75,67.5 84.75,67.5 86.25,69 v5(86.25,70.75) 101,70.75 102.75,72.5 102.75,78.75 103.25,79.25 107.75,79.25 v4(110.5,82)
  Bottom Layer w1: v4(110.5,82) v4(110.5,85.25)
VCC_IN: "DC IN.1" F1.1 | length 7.5
  Top Layer w0.254: v2(131.75,55.75) F1.1@131.875,55.625 ; 137.94,55.625 138.829,56.513
  Top Layer w4: F1.1@131.875,55.625 F1.1@132,55.625
  Top Layer w5: F1.1@132,55.625 v2(135.75,55.625) 137.94,55.625
  other v2: 130.75,54 132,54 133.25,54 135.75,54 130.75,57.25 132,57.25 133.25,57.25 135.75,57.25
VDD: C7.1 C12.2 D2.2 F1.2 Q2.2 R4.2 U3.1 | length 73.5
  Top Layer w0.254: v3@108,76.64 108.25,76.39 v3@108.25,75.25 ; 132,65.54 132.46,66
  Top Layer w1: v3(105.75,74.25) v3(105.75,75.5) v3(105.75,76.75) Q2.2@107,76.75 ; v3(106.96,75.6) 107.555,76.195 ; v3@108,76.64 110.36,79 R4.2 ; v3(108.25,74.25) v3@108.25,75.25 ; C12.2 123,73.85 D2.2
  Top Layer w2: D2.2 123.74,68.96 U3.1 132.46,66 C7.1
  Top Layer w3: v2(132,61.8) 132,65.54
  Bottom Layer w0.254: v2(132,61.8) v2@132,62
  Bottom Layer w4: v3(106.96,75.6) 107.655,74.905 108.06,74.5 119.5,74.5 v2@132,62
  other v2: 130.75,60.25 132,60.25 133.25,60.25 130.75,61.75 133.25,61.8 133.25,63.5
  other v3: 108.25,75.5 108.25,76.75
VDD_DXL: C13.2 C14.2 C15.2 C16.2 C17.2 F2.2 P2.2 P3.2 P4.2 P5.2 P6.2 | length 67.6
  Top Layer w1: C13.2 v2(60.5,54.1) C14.2 v2(64.5,54.1) C15.2 v2(68.5,54.1) C16.2 v2(72.5,54.1) C17.2 75.153,54.753
  Top Layer w2: 75.153,54.753 v2(76.75,54.753) v2(79,54.753) P2.2 P5.2 P4.2 P3.2 v2(98.25,54.753) P6.2 104.703,54.753 F2.2
  Bottom Layer w2: P2.2 P5.2 P4.2 P3.2 v2(98.25,54.753) P6.2
  other v2: 84.5,54.75 89,54.75 93.75,54.75 103.25,54.75 105,55.25 108.5,55.25 105,56.75 106.75,56.75 108.5,56.75 105,58.25 108.5,58.25
VDDA: B3.1 C25.2 U6.13 | length 17.2
  Top Layer w0.254: U6.13 82.761,81.761 83.25,82.25 83.25,92.25 84,93 C25.2 84.75,94.5 84.9,94.65 B3.1
VSSA: B4.1 C25.1 U6.12 | length 15.6
  Top Layer w0.254: U6.12 82.971,81.253 84.75,83.032 C25.1 B4.1
pads on no net: "BOOT 0.2" "BOOT 0.4" "BOOT 1.2" "BOOT 1.4" "Micro USB.4" EF1.3 EF1.4 P8.7 RESET.2 RESET.4 U1.2 U1.3 U1.9 U1.11 U2.6 U2.7 U4.8 U4.9 U4.10 U4.11 U4.12 U4.13 U5.6 U5.8 U5.9 U5.10 U5.13 U5.14 U5.19 U5.22 U5.23 U5.24 U5.27 U5.28 U6.8 U6.9 U6.10 U6.11 U6.14 U6.15 U6.16 U6.17 U6.20 U6.21 U6.22 U6.23 U6.24 U6.25 U6.26 U6.27 U6.38 U6.39 U6.40 U6.41 U6.42 U6.44 U6.45
copper on no net: | length 320
  Top Layer w0.254: 40,50 150,50 150,100 40,100 40,50

## Polygon pours and split planes (outlines as drawn)
no net on Top Layer "Top Cover" (solid, pour order 48): 40,100 150,100 150,50 40,50
VDD on Top Layer "VDD" (solid, pour order 10): 104.5,77.5 105,78 108.5,78 109.5,77 109.5,76.5 109,76 109,73.75 108.5,73.25 104.5,73.25
GND on Top Layer "GND" (solid, pour order 18): 143.75,68.25 148.75,68.25 149.5,67.5 149.5,52.25 147.75,50.5 143,50.5 142,51.5 142,60 143.75,61.75
VCC_IN on Top Layer "VCC_IN" (solid, pour order 22): 128.75,58.25 129.25,58.75 135.5,58.75 137.5,60.75 140.5,60.75 141.25,60 141.25,53 140.5,52.25 129.75,52.25 128.75,53.25
VDD on Top Layer "VDD" (solid, pour order 26): 121.75,75.5 123.25,75.5 124.25,74.5 124.25,71 125.25,70 131.25,70 133.5,67.75 140.25,67.75 141,67 141,64.5 140.25,63.75 136,63.75 135.25,63 135.25,60.5 134.5,59.75 129.75,59.75 129,60.5 129,66.5 127.75,67.75 122.25,67.75 121.25,68.75 121.25,71.5 121.75,72
VDD_DXL on Top Layer "VDD_DXL" (solid, pour order 36): 103.25,60 108.75,60 109.5,59.25 109.5,54 108.75,53.25 102.75,53.25 102.25,53.75 102.25,56.75 103.25,57.75
VDD_DXL on Top Layer "VDD_DXL" (solid, pour order 42): 57.5,53.25 57,53.75 57,55.25 73,55.25 74.25,56.5 76.75,56.5 77.75,55.5 77.75,53.5 77.5,53.25
NetC11_1 on Top Layer "VDD_DXL" (solid, pour order 46): 101,63.5 102.75,63.5 105,65.75 105,70.25 106,71.25 115,71.25 116.75,69.5 116.75,68.25 117.5,67.5 123.5,67.5 125.5,65.5 125.5,61.25 119,61.25 116.25,58.5 116.25,54.25 115.75,53.75 110.5,53.75 110,54.25 110,59.5 109,60.5 103,60.5 101,62.5
no net on Bottom Layer "Bottom Cover" (solid, pour order 50): 40,100 150,100 150,50 40,50
VCC_IN on Bottom Layer "VCC_IN" (solid, pour order 24): 128.75,58.25 129.25,58.75 135.5,58.75 137.5,60.75 140.5,60.75 141.25,60 141.25,53 140.5,52.25 129.75,52.25 128.75,53.25
VDD on Bottom Layer "VDD" (solid, pour order 28): 128.75,60.5 129.5,59.75 134.75,59.75 134.75,66.5 131,70.25 126.5,70.25 118.75,78 104.25,78 103.75,77.5 103.75,72.75 118.5,72.75 128.75,62.5
NetC11_1 on Bottom Layer "VDD_DXL" (solid, pour order 34): 105.25,70.75 113.75,70.75 116.5,68 116.5,67.5 122.75,67.5 125,65.25 125,61.25 119,61.25 116.25,58.5 116.25,54.75 115.25,53.75 111.25,53.75 110,55 110,59.5 109,60.5 107.25,60.5 105.25,62.5
VDD_DXL on Bottom Layer "VDD_DXL" (solid, pour order 38): 103.25,60 108.75,60 109.5,59.25 109.5,54 108.75,53.25 102.75,53.25 102.25,53.75 99,53.75 99,55.5 99.25,55.75 101.25,55.75 103.25,57.75
VDD_DXL on Bottom Layer "VDD_DXL" (solid, pour order 44): 83,55.75 83,53.75 78.25,53.75 77.5,53 57,53 56.75,53.25 56.75,54.75 57.25,55.25 73,55.25 74.25,56.5 76.75,56.5 77.5,55.75

## Silkscreen, mask and mechanical layers (free items; w line width, h text height)
Top Overlay:
  region: 53.471,52.327 ccw(c52.55,54.549) 53.825,52.509 54.705,51.792 55.308,52.395 54.591,53.275 ccw(c52.55,54.55) 54.895,54.009 56.024,54.124 56.024,54.976 54.895,55.091 ccw(c52.55,54.55) 54.591,55.825 55.308,56.705 54.705,57.308 53.825,56.591 ccw(c52.55,54.55) 53.091,56.895 52.976,58.024 52.124,58.024 52.009,56.895 ccw(c52.55,54.55) 51.275,56.591 50.395,57.308 49.792,56.705 50.509,55.825 ccw(c52.55,54.55) 50.205,55.091 49.076,54.976 49.076,54.124 50.205,54.009 ccw(c52.55,54.55) 50.509,53.275 49.792,52.395 50.395,51.792 51.275,52.509 ccw(c52.55,54.549) 51.629,52.327 52.131,53.54 cw(c52.55,54.55) 51.456,54.55 cw(c52.55,54.55) 52.969,53.54
  text "ACCEL" at 89.25,95.75 h0.7
  text "POLIBATAM" at 69,87.25 h1.52
  text "BRCM-V2.1" at 101.25,79 h1.52
  text "GYRO" at 98,74.75 h0.7
  text "BARELANG" at 116.25,61.5 h1.52
  text "ROBOTIC" at 117.25,58.75 h1.52
  text "-" at 145.5,51.75 h1.52
  text "+" at 138.5,50.75 h1.52

## Text inside footprints (layer, text, board x,y; h text height)
P8: Top Overlay "10" at 61.468,74.814 h1.27 r90; Top Overlay "9" at 64.008,74.814 h1.27 r90; Top Overlay "1" at 64.008,61.098 h1.27 r90; Top Overlay "2" at 61.468,60.59 h1.27 r90
U6: Top Overlay "1" at 81.85,75.69 h0.63 r180